# Altium PCB Flight Control Board.PcbDoc
Units mil, origin at the board's own origin, x right, y up, seen from the top; angles counter-clockwise.
Board outline 3604 x 4112 mil, 2 copper layers (Top Layer, Bottom Layer); 65 components, 67 nets, 299 pads, 15 vias.
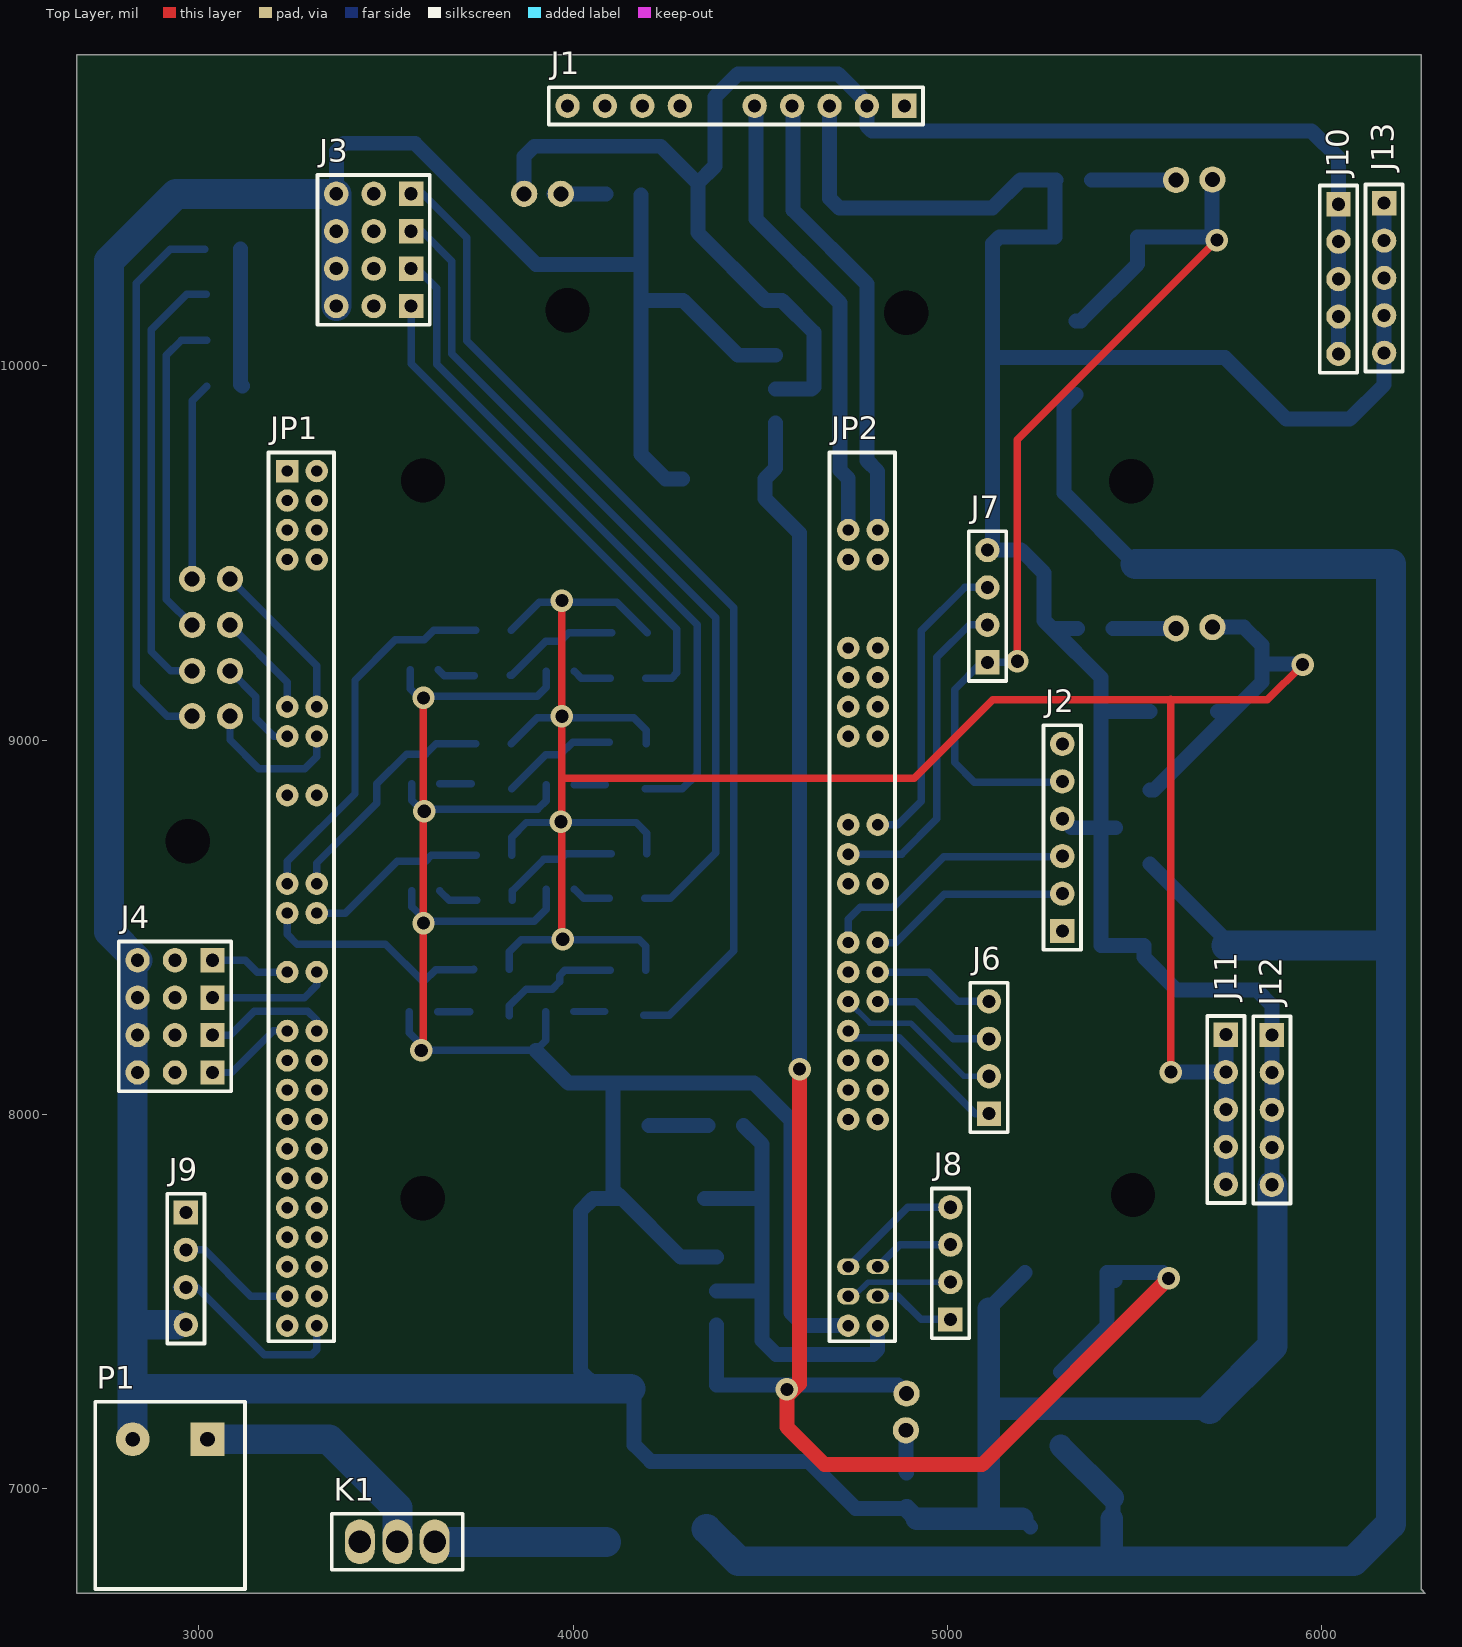
[diagram p0: Top Layer view]
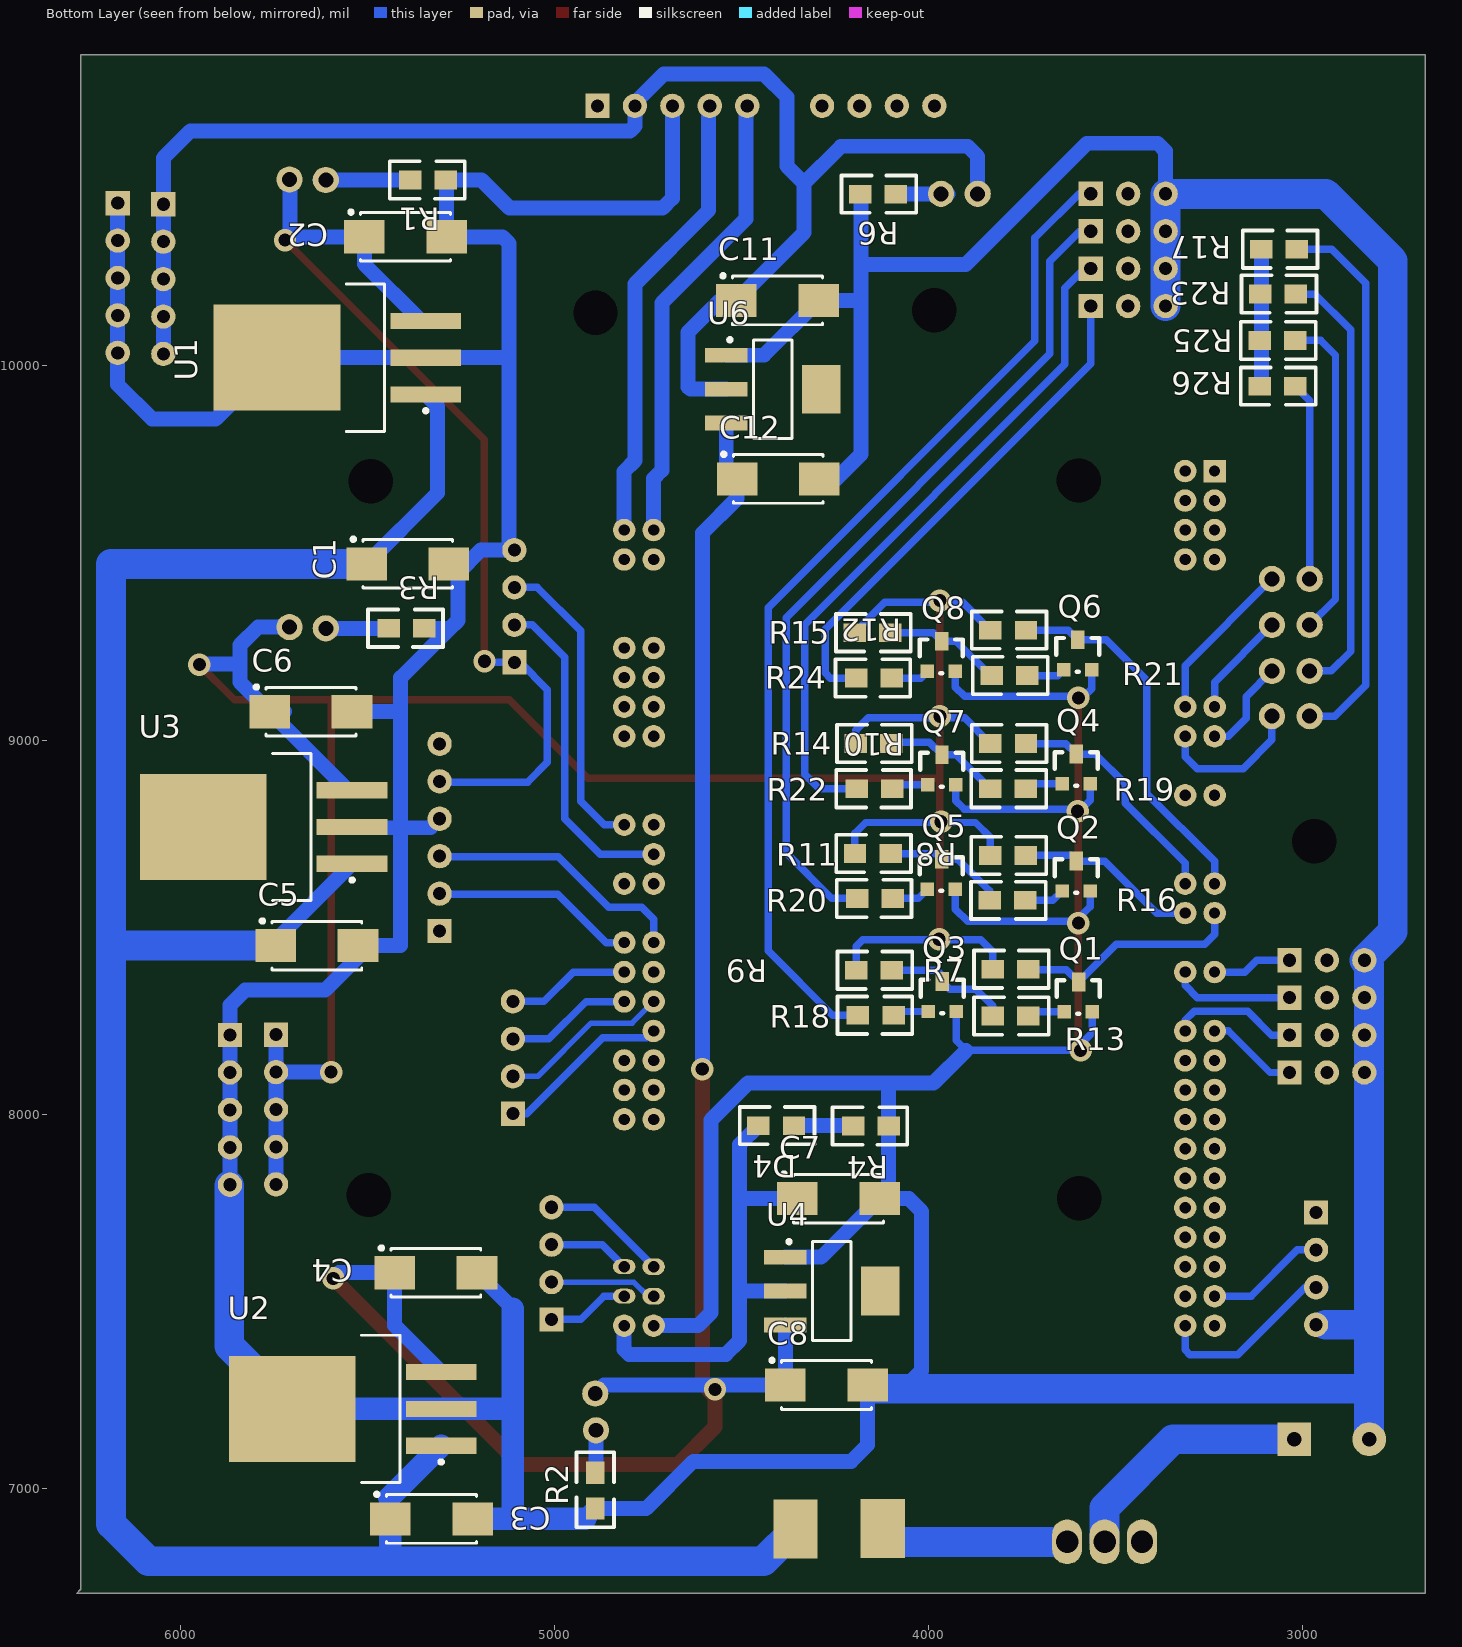
[diagram p1: Bottom Layer view, seen from below]

## Layer stack, top to bottom
Top Layer: signal copper 1.4
Dielectric: dielectric 12.6, FR-4, Dk 4.8
Bottom Layer: signal copper 1.4

## Board outline
2673,10827 2673,6720 6277,6720 6266,6731 6266,10832 2673,10832

## Design rules (kind name [scope] priority, off if disabled: settings)
Clearance [All] p1: gap=10
PolygonConnect [All] p1: connectstyle=Relief reliefconductorwidth=10 reliefentries=4 polygonreliefangle="90 Angle"
RoutingVias [All] p1: holewidth=28 width=50 viastyle="Through Hole" minholewidth=28 minwidth=50 maxholewidth=28 maxwidth=50
SilkscreenOverComponentPads [All] p1: minsilkscreentomaskgap=10
SolderMaskExpansion [All] p1: expansion=4
Width [All] p1: maxlimit=100 minlimit=15 preferedwidth=20
27 further rules are at their usual default settings.

## Components (designator, comment, footprint, x,y, rotation, side; value= is the part's Value field where it differs from the comment)
C1 "CAP_C" CAP_C 5392,9471 r180 bottom
C2 "CAP_C" CAP_C 5398,10345 r180 bottom
C3 "CAP_C" CAP_C 5329,6919 r180 bottom
C4 "CAP_C" CAP_C 5317,7577 r180 bottom
C5 "CAP_C" CAP_C 5635,8451 r180 bottom
C6 "CAP_C" CAP_C 5651,9076 r180 bottom
C7 "CAP_C" CAP_C 4241,7775 r180 bottom
C8 "CAP_C" CAP_C 4273,7277 r180 bottom
C11 "CAP_C" CAP_C 4404,10175 r180 bottom
C12 "CAP_C" CAP_C 4402,9698 r180 bottom
D4 "LED" LED 4455,7970 r180 bottom
J1 "传感器" Header10 4885,10695 r270 top
J2 "蓝牙" Header6 5307,8490 r180 top
J3 "捕获信号线" Header4*3 3567,10160 r180 top
J4 "PWM信号线" Header4*3 3036,8112 r180 top
J6 "TIM8" Header4 5111,8002 r180 top
J7 "UART4" Header4 5107,9208 r180 top
J8 "SPI2" Header4 5008,7452 r180 top
J9 "UART3" Header4 2965,7738 r0 top
J10 "3.3v电源" Header5 6045,10432 r0 top
J11 "5v电源" Header5 5744,8213 r0 top
J12 "GND" Header5 5867,8212 r0 top
J13 "Comment" Header5 6167,10435 r0 top
JP1 "Header60" Header60#1 3236,9719 r0 top
JP2 "Header60" Header60#2 4735,9719 r0 top
K1 "KEY" KEY 3630,6858 r270 top
P1 "POWER" POWER 2823,7132 r90 top
Q1 "NPN" NPN 3600,8314 r180 bottom
Q2 "NPN" NPN 3606,8637 r180 bottom
Q3 "NPN" NPN 3964,8315 r180 bottom
Q4 "NPN" NPN 3606,8923 r180 bottom
Q5 "NPN" NPN 3966,8642 r180 bottom
Q6 "NPN" NPN 3602,9228 r180 bottom
Q7 "NPN" NPN 3965,8921 r180 bottom
Q8 "NPN" NPN 3966,9224 r180 bottom
R1 "RES" LED 5290,10497 r0 bottom
R2 "RES" LED 4891,6947 r90 bottom
R3 "RES" LED 5348,9299 r0 bottom
R4 "RES" LED 4107,7969 r0 bottom
R6 "RES" LED 4183,10459 r180 bottom
R7 "RES" LED 3829,8388 r180 bottom
R8 "RES" LED 3836,8692 r180 bottom
R9 "RES" LED 4194,8385 r180 bottom
R10 "RES" LED 3835,8991 r180 bottom
R11 "RES" LED 4197,8697 r180 bottom
R12 "RES" LED 3835,9294 r180 bottom
R13 "RES" LED 3829,8263 r180 bottom
R14 "RES" LED 4195,8991 r180 bottom
R15 "RES" LED 4198,9287 r180 bottom
R16 "RES" LED 3837,8572 r180 bottom
R17 "RES" LED 3111,10312 r180 bottom
R18 "RES" LED 4094,8265 r0 bottom
R19 "RES" LED 3836,8870 r180 bottom
R20 "RES" LED 4096,8577 r0 bottom
R21 "RES" LED 3832,9173 r180 bottom
R22 "RES" LED 4097,8870 r0 bottom
R23 "RES" LED 3114,10192 r180 bottom
R24 "RES" LED 4099,9166 r0 bottom
R25 "RES" LED 3116,10068 r180 bottom
R26 "RES" LED 3116,9946 r180 bottom
U1 "LM2940" 2940 5580,10022 r0 bottom
U2 "LM2940" 2940 5539,7213 r0 bottom
U3 "LM2940" 2940 5777,8768 r0 bottom
U4 "LM1117" 1117 4259,7528 r180 bottom
U6 "LM1117" 1117 4417,9938 r180 bottom

## Footprints (in the part's own frame and the unit in brackets; to place one, negate y for a bottom-side part, rotate by r counter-clockwise, add the part's x,y. Pads: shape width x height; smd on the part's side, far side on the other; paste and mask are expansions set on the pad)
1117 [mm]
  rect 2.9x1 smd: 1(-3.15,2.3) 2(-3.15,0) 3(-3.15,-2.3)
  rect 2.6x3.3 smd: 4(3.3,0)
  silkscreen extent -3.03,-3.35 1.3,3.47, body extent -1.85,-3.35 1.85,3.35, height 1.8
2940 [mm]
  rect 4.8x1.1 smd: 1(-6,2.5) 2(-6,0) 3(-6,-2.5)
  rect 8.6x7.2 smd: 4(4.1,0)
  silkscreen extent -6.12,-5 -0.6,5, body extent -4.9,-5 5.6,5, height 4.38
CAP_C [mm]
  rect 2.75x2.25 smd: 1(-2.794,0) 2(2.794,0)
  silkscreen extent -3.83,-1.65 3.05,1.8, body extent -3.05,-1.65 3.05,1.65, height 2.6
Header4 [mil]
  rect 65x65 hole 35: 1(0,0)
  round 65 hole 35: 2(0,-100) 3(0,-200) 4(0,-300)
  silkscreen extent -50,-350 50,50
Header4*3 [mil]
  rect 65x65 hole 35: 1(0,0) 4(0,-100) 7(0,-200) 10(0,-300)
  round 65 hole 35: 2(100,0) 3(200,0) 5(100,-100) 6(200,-100) 8(100,-200) 9(200,-200) 11(100,-300) 12(200,-300)
  silkscreen extent -50,-350 250,50
Header5 [mil]
  rect 65x65 hole 35: 1(0,0)
  round 65 hole 35: 2(0,-100) 3(0,-200) 4(0,-300) 5(0,-400)
  silkscreen extent -50,-450 50,50
Header6 [mil]
  rect 65x65 hole 35: 1(0,0)
  round 65 hole 35: 2(0,-100) 3(0,-200) 4(0,-300) 6(0,-500)
  round 65 hole 35 paste+0: 5(0,-400)
  silkscreen extent -50,-550 50,50
Header10 [mil]
  rect 65x65 hole 35: 1(0,0)
  round 65 hole 35: 2(0,-100) 3(0,-200) 4(0,-300) 5(0,-400) 7(0,-600) 8(0,-700) 9(0,-800) 10(0,-900)
  silkscreen extent -50,-950 50,50
Header60#1 [mil]
  rect 60x60 hole 30: 1(0,0)
  round 60 hole 30: 2(78.74,0) 3(0,-78.74) 4(78.74,-78.74) 5(0,-157.48) 6(78.74,-157.48) 7(0,-236.22) 8(78.74,-236.22) 17(0,-629.92) 18(78.74,-629.92) 19(0,-708.66) 20(78.74,-708.66) 23(0,-866.14) 24(78.74,-866.14) 29(0,-1102.36) 30(78.74,-1102.36) 31(0,-1181.1) 32(78.74,-1181.1) 35(0,-1338.58) 36(78.74,-1338.58) 39(0,-1496.06) 40(78.74,-1496.06) 41(0,-1574.8) 42(78.74,-1574.8) 43(0,-1653.54) 44(78.74,-1653.54) 45(0,-1732.28) 46(78.74,-1732.28) 47(0,-1811.02) 48(78.74,-1811.02) 49(0,-1889.76) 50(78.74,-1889.76) 51(0,-1968.5) 52(78.74,-1968.5) 53(0,-2047.24) 54(78.74,-2047.24) 55(0,-2125.98) 56(78.74,-2125.98) 57(0,-2204.72) 58(78.74,-2204.72) 59(0,-2283.46) 60(78.74,-2283.46)
  silkscreen extent -50,-2325 125,50
Header60#2 [mil]
  round 60 hole 30: 5(0,-157.48) 6(78.74,-157.48) 7(0,-236.22) 8(78.74,-236.22) 13(0,-472.44) 14(78.74,-472.44) 15(0,-551.18) 16(78.74,-551.18) 17(0,-629.92) 18(78.74,-629.92) 19(0,-708.66) 20(78.74,-708.66) 25(0,-944.88) 26(78.74,-944.88) 27(0,-1023.62) 29(0,-1102.36) 30(78.74,-1102.36) 33(0,-1259.84) 34(78.74,-1259.84) 35(0,-1338.58) 36(78.74,-1338.58) 37(0,-1417.32) 38(78.74,-1417.32) 39(0,-1496.06) 41(0,-1574.8) 42(78.74,-1574.8) 43(0,-1653.54) 44(78.74,-1653.54) 45(0,-1732.28) 46(78.74,-1732.28) 59(0,-2283.46) 60(78.74,-2283.46)
  oval 60x45 hole 30: 55(0,-2125.98) 57(0,-2204.72)
  oval 60x40 hole 30: 56(78.74,-2125.98) 58(78.74,-2204.72)
  silkscreen extent -50,-2325 125,50
KEY [mil]
  oval 120x80 hole 60: 1(0,0) 2(0,-100) 3(0,-200)
  silkscreen extent -75,-275 75,75
LED [mil]
  rect 60x50 smd: 1(0,0) 2(95,0)
  silkscreen extent -50,-50 150,50
NPN [mil]
  rect 36x36 smd: b(-37.5,-40) e(37.5,-40)
  rect 36x50 smd: c(0.5,40)
  silkscreen extent -58,-45 58,45
POWER [mil]
  round 90 hole 39.37: 1(0,0)
  rect 90x90 hole 39.37 mask+4: 2(0,-200)
  silkscreen extent -400,-300 100,100

## Part data
J1: library part Header10
J2: library part Header6
J3 J4: library part Header4*3
J6 J7 J8 J9: library part Header4
J10 J11 J12: library part Header5

## Free pads (board coordinates)
  round 60 hole 118.11: 0(2970,8730) 0(3599,9694) 0(4890,10142) 1(3985,10149) 1(5491,9692) 2(3598,7776) 3(5496,7785)
  round 70 hole 40: 2(5611,10497) 3(5708,10498) 4(5611,9299) 5(5708,9302) 6(3967,10460) 6(4889,7156) 9(3869,10460) 9(4891,7254) 10(3083,9431) 11(3083,9308) 12(3083,9185) 13(3083,9064) 14(2982,9064) 15(2982,9185) 16(2982,9308) 17(2982,9431)
  rect 118.11x157.48 smd far side: 7(4123,6893) 8(4356,6892)

## Via types
v1: diameter 60, hole 35, Top Layer to Bottom Layer, 15 vias

## Nets (pads, with @x,y where several pads share a name; then routed paths per layer and width w, separated by ;. In a path a pad name is that pad's centre, name@x,y a point inside that pad or via, vN(x,y) a via of type N, cw(c..) or ccw(c..) an arc to the next point about the centre after c; other vN are vias at no path point)
A0: J3.1 R24.2 | length 1362.9
  Bottom Layer w20: J3.1 3567,10006 4277,9296 4277,9180 4263,9166 R24.2
A1: J3.4 R22.2 | length 1832.6
  Bottom Layer w20: J3.4 3584,10260 3636,10208 3636,10004 4331,9309 4331,8909 4292,8870 R22.2
A2: J3.7 R20.2 | length 2255.7
  Bottom Layer w20: J3.7 3596,10360 3676,10280 3676,10032 4381,9327 4381,8699 4259,8577 R20.2
A3: J3.10 R18.2 | length 2709.5
  Bottom Layer w20: J3.10 3598,10460 3716,10342 3716,10067 4429,9354 4429,8437 4257,8265 R18.2
GND: C1.2 C2.2 C3.2 C4.2 C5.2 C6.2 C7.2 C8.2 C11.2 C12.2 J1.3 J2.4 J3.3 J3.6 J3.9 J3.12 J4.3 J4.6 J4.9 J4.12 J7.4 J9.4 J12.1 J12.2 J12.3 J12.4 J12.5 J13.1 J13.2 J13.3 J13.4 J13.5 JP2.59 P1.1 Q1.e Q2.e Q3.e Q4.e Q5.e Q6.e Q7.e Q8.e R1.1 R2.1 R3.1 R4.1 R6.1 U1.2 U1.4 U2.2 U2.4 U3.2 U4.1 U6.1 | length 23102.3
  Top Layer w20: v1@3600,8177 v1(3600,8511) v1(3600,9113)
  Bottom Layer w20: Q1.e 3562.5,8218.5 3610,8171 3900,8171 3926.5,8197.5 Q3.e ; Q6.e 3564.5,9137.5 3585,9117 3904,9117 3928.5,9141.5 Q8.e ; Q2.e 3568.5,8555.5 3608,8516 3896,8516 3928.5,8548.5 Q5.e ; Q4.e 3568.5,8839.5 3592,8816 3905,8816 3927.5,8838.5 Q7.e
  Bottom Layer w40: J3.12 3367,10574 3388,10595 3577,10595 3901,10271 4181,10271 ; 3900,8171 3987,8084 4483,8084 4582,7985 4582,7470 4616.46,7435.54 JP2.59 ; 4107,8081 R4.1 4107,7799 C7.2 ; R6.1@4181,10457 4181,10175 ; C12.2 4247,9698 4181,9764 4181,10175 ; U4.1 4287.45,7618.55 C7.2 ; U6.1 4440.45,10028.55 C11.2 4181,10175 ; J1.3 4685,10448 4711,10422 5120,10422 5195,10497 R1.1 ; R2.1 4755,6947 4629,7073 4207,7073 4163,7117 C8.2 4057,7277 4019,7315 4019,7741 4053,7775 C7.2 ; 5111,7481 C4.2 ; 5123,10022 U1.2 U1.4 5905.42,9858 6075,9858 6167,9950 J13.5 J13.4 J13.3 J13.2 J13.1 ; C3.2@5200,6920 C3.2@5222,6898 ; R1.1@5288,10495 C2.2 5139,10345 5121,10327 5121,9522 J7.4 5197,9508 5258,9447 5258,9320 5281,9297 ; 5331,8766 5411,8766 ; R3.1 5281,9299 5281,9297 ; 5419,9076 C6.2 ; U3.2@5448.78,8766 5411,8766 ; J12.5 J12.4 J12.3 J12.2 J12.1 5867,8292 5827,8332 5613,8332 5525,8420 C5.2 5411,8451 5411,8766 ; 5281,9297 5411,9167 5411,8766
  Bottom Layer w50: R2.1 4918,6920
  Bottom Layer w60: 4918,6920 C3.2@5200,6920 ; 5111,6925 5111,7213 ; 5111,7481 5111,7213 ; U2.4 U2.2 5111,7213
  Bottom Layer w80: P1.1 2823,7267 ; 2832,7438 J9.4@2940,7438 ; J3.3 J3.6 J3.9 J3.12 2939,10460 2760,10281 2760,8488 J4.12 2823,8399 2823,7267 ; C8.2@4153,7267 2823,7267 ; U2.4 5869,7381.58 J12.5@5869,7810
  other v1: 3594,8171 3602,8810
NetD1_2: pad.2@5611,10497 R1.2 | length 241
  Bottom Layer w40: R1.2 5611,10497 pad.2@5626,10497
NetD2_2: pad.6@4889,7156 R2.2 | length 114.8
  Bottom Layer w40: pad.6@4889,7156 4889,7044 R2.2
NetD3_2: pad.4 R3.2 | length 168
  Bottom Layer w40: R3.2 pad.4
NetD4_2: D4.2 R4.2 | length 157
  Bottom Layer w40: R4.2@4203,7970 D4.2
NetD5_2: 
NetD6_2: pad.6@3967,10460 R6.2 | length 139
  Bottom Layer w40: pad.6@3949,10459 R6.2
NetD7_1: pad.14 R17.2 | length 1480.1
  Bottom Layer w20: pad.14 2915,9064 2832,9147 2832,10221 2923,10312 R17.2
NetD8_1: pad.15 R23.2 | length 1177.5
  Bottom Layer w20: pad.15 2924,9185 2872,9237 2872,10096.28 2967.72,10192 R23.2
NetD9_1: pad.16 R25.2 | length 873.1
  Bottom Layer w20: pad.16 2913,9377 2913,10028 2953,10068 R25.2
NetD10_1: pad.17 R26.2 | length 531.2
  Bottom Layer w20: pad.17 2982,9907 R26.2
NetF1_2: K1.1 pad.7 | length 458
  Bottom Layer w80: K1.1 pad.7@4088,6858
NetK1_2: K1.2 P1.2 | length 673.8
  Bottom Layer w80: P1.2 3347,7132 3530,6949 K1.2
NetQ1_B: Q1.b R13.2 | length 85.5
  Bottom Layer w20: Q1.b R13.2@3723,8274
NetQ2_B: Q2.b R16.2 | length 108.9
  Bottom Layer w20: Q2.b 3668.5,8572 R16.2
NetQ3_B: Q3.b R18.1 | length 82.5
  Bottom Layer w20: Q3.b R18.1@4084,8275
NetQ3_C: Q3.c R9.2 R13.1 | length 345.4
  Bottom Layer w20: R13.1 3829,8290 3874,8335 3943.5,8335 Q3.c 3963.5,8370.5 3978,8385 R9.2
NetQ4_B: Q4.b R19.2 | length 84.5
  Bottom Layer w20: Q4.b R19.2@3728,8883
NetQ5_B: Q5.b R20.1 | length 102.9
  Bottom Layer w20: Q5.b 4028.5,8577 R20.1
NetQ5_C: Q5.c R11.2 R16.1 | length 331.4
  Bottom Layer w20: R16.1 3837,8597 3922,8682 Q5.c 3980.5,8697 R11.2
NetQ6_B: Q6.b R21.2 | length 103.1
  Bottom Layer w20: Q6.b 3655.5,9172 R21.2@3736,9172
NetQ7_B: Q7.b R22.1 | length 83.5
  Bottom Layer w20: Q7.b R22.1@4086,8881
NetQ7_C: Q7.c R14.2 R19.1 | length 311.8
  Bottom Layer w20: R19.1 3927,8961 Q7.c 3998.5,8995 R14.2@4096,8995
NetQ8_B: Q8.b R24.1 | length 103
  Bottom Layer w20: Q8.b 4021.5,9166 R24.1
NetQ8_C: Q8.c R15.2 R21.1 | length 318.2
  Bottom Layer w20: R21.1 3836,9173 3927,9264 Q8.c 3988.5,9287 R15.2
PA0: JP1.30 Q4.c R10.2 | length 642.5
  Bottom Layer w20: JP1.30 3314.74,8671.74 3475,8832 3475,8883 3555,8963 Q4.c 3633.5,8991 R10.2
PA1: JP1.29 Q6.c R12.2 | length 996.8
  Bottom Layer w20: JP1.29 3236,8676 3417,8857 3417,9160 3525,9268 Q6.c 3627.5,9294 R12.2
PA2: JP1.32 Q2.c R8.2 | length 490.1
  Bottom Layer w20: JP1.32 3390.9,8537.9 3530,8677 Q2.c 3620.5,8692 R8.2
PA3: JP1.31 Q1.c R7.2 | length 621.6
  Bottom Layer w20: JP1.31 3236,8481 3262,8455 3498.5,8455 Q1.c 3632.5,8387 3733,8387 R7.2
PA4: 
PA5: 
PA6: J4.7 JP1.36 | length 328
  Bottom Layer w20: J4.7 3282,8312 3314.74,8344.74 JP1.36
PA7: J4.10 JP1.35 | length 213.1
  Bottom Layer w20: J4.10 3124,8412 3155.58,8380.42 JP1.35
PA9: J2.2 JP2.34 | length 544.6
  Bottom Layer w20: JP2.34 4862.16,8459.16 4991,8588 J2.2@5305,8588
PA10: J2.3 JP2.33 | length 701
  Bottom Layer w20: JP2.33 4735,8521 4767,8553 4855,8553 4990,8688 J2.3@5305,8688
PB0: J4.4 JP1.40 | length 344.4
  Bottom Layer w20: J4.4 3084,8212 3148,8276 3291,8276 3314.74,8252.26 JP1.40
PB1: J4.1 JP1.39 | length 246
  Bottom Layer w20: J4.1 3088,8112 3198.94,8222.94 JP1.39
PB6: J1.4 JP2.6 | length 1224
  Bottom Layer w40: J1.4@4588,10692 4588,10416 4785,10219 4785,9747 4813.74,9718.26 JP2.6
PB7: J1.5 JP2.5 | length 1232.8
  Bottom Layer w40: J1.5@4488,10692 4488,10393 4713,10168 4713,9721 4735,9699 JP2.5
PB10: J9.2 JP1.57 | length 322.2
  Bottom Layer w20: J9.2 3015,7638 3138.72,7514.28 JP1.57
PB11: J9.3 JP1.60 | length 519.4
  Bottom Layer w20: J9.3@2940,7538 2994,7538 3174,7358 3302,7358 3314.74,7370.74 JP1.60
PB12: J8.1 JP2.58 | length 220.1
  Bottom Layer w20: JP2.58 4867.72,7514.28 4930,7452 J8.1
PB13: J8.2 JP2.57 | length 288.6
  Bottom Layer w15: JP2.57 4750.71,7514.28 4788.43,7552 J8.2
PB14: J8.3 JP2.56 | length 218.7
  Bottom Layer w20: JP2.56 4872.72,7652 J8.3
PB15: J8.4 JP2.55 | length 338.9
  Bottom Layer w20: JP2.55 4893.98,7752 J8.4
PC6: J6.1 JP2.39 | length 467.5
  Bottom Layer w20: JP2.39 4752.94,8205 4871,8205 5074,8002 J6.1
PC7: J6.3 JP2.38 | length 338.5
  Bottom Layer w20: JP2.38 4915.32,8301.68 5015,8202 J6.3
PC8: J6.2 JP2.37 | length 458.7
  Bottom Layer w15: JP2.37 4792.68,8244 4902,8244 5044,8102 J6.2
PC9: J6.4 JP2.36 | length 329.7
  Bottom Layer w20: JP2.36 4949.58,8380.42 5028,8302 J6.4
PC10: J7.2 JP2.27 | length 878.2
  Bottom Layer w20: JP2.27 4877.38,8695.38 4972,8790 4972,9221 5059,9308 J7.2
PC11: J7.3 JP2.26 | length 822.4
  Bottom Layer w20: JP2.26 4867.12,8774.12 4930,8837 4930,9292 5046,9408 J7.3
PF7: JP1.18 pad.10 | length 437.9
  Bottom Layer w20: pad.10 3314.74,9199.26 JP1.18
PF8: JP1.17 pad.11 | length 286.5
  Bottom Layer w20: pad.11 3236,9155 JP1.17 JP1.17@3233,9092.08
PF9: JP1.20 pad.13 | length 394.4
  Bottom Layer w20: pad.13 3083,9001 3160,8924 3283,8924 3314.74,8955.74 JP1.20
PF10: JP1.19 pad.12 | length 259.3
  Bottom Layer w20: pad.12 3152,9116 3152,9058 3199.66,9010.34 JP1.19
VCC: R17.1 R23.1 R25.1 R26.1 | length 368.1
  Bottom Layer w40: R17.1 3111,9951 R26.1
VCC_3.3V_1: 
VCC_3.3V_2: C7.1 D4.1 JP2.60 U4.2 | length 1261.8
  Bottom Layer w40: C7.1 4503,7775 ; U4.2 4505,7528 ; D4.1 4505,7920 4505,7528 ; JP2.60 4813.74,7371.74 4801,7359 4542,7359 4505,7396 4505,7528
VCC_3.3V_3: C11.1 J1.2 J10.1 J10.2 J10.3 J10.4 J10.5 pad.9@3869,10460 U6.2 | length 4013.3
  Bottom Layer w40: pad.9@3869,10460 3869,10560 3896,10587 4234,10587 4333,10488 ; U6.2 4637,9938 4643,9944 4643,10090 4558,10175 C11.1 4333,10356 4333,10488 ; J10.5 J10.4 J10.3 J10.2 J10.1 6045,10556 5973,10628 4798,10628 4785,10641 J1.2 4785,10703 4708,10780 4440,10780 4379,10719 4379,10534 4333,10488
VCC_5V_1: C2.1 J2.5 J7.1 pad.3@5708,10498 U1.3 | length 2697
  Top Layer w20: v1(5187,9211) 5187,9803 v1(5720,10336)
  Bottom Layer w20: v1@5180,9208 J7.1 5092,9208 5019,9135 5019,8941 5072,8888 5305,8888 J2.5
  Bottom Layer w40: U1.3 5356.43,10120.43 5508,10272 C2.1 v1@5707,10345 ; pad.3@5707,10497 v1@5707,10345 ; v1@5710,10342 v1@5707,10345
VCC_5V_2: C4.1 C8.1 C12.1 pad.9@4891,7254 U2.3 U4.3 U6.3 | length 5210.1
  Top Layer w40: v1(4605,8121) 4605,7280 4571,7246 4571,7165 4672,7064 5093,7064 v1(5591,7562)
  Bottom Layer w40: U4.3 C8.1 4868,7277 pad.9@4891,7254 ; U6.3 4541,9727 C12.1 4512,9646 4605,9553 v1(4605,8121) ; U2.3 5427,7435.65 C4.1 ; C4.1@5448,7556 C4.1 ; v1(5591,7562) 5576,7577 C4.1
  other v1: 4571,7265
VCC_5V_3: C6.1 J11.1 J11.2 J11.3 J11.4 J11.5 pad.5 R7.1 R8.1 R9.1 R10.1 R11.1 R12.1 R14.1 R15.1 U3.3 | length 7219.1
  Top Layer w20: v1(3970,9373) v1(3970,9064) 3970,8470 v1(3972,8468) ; 3975,8898 4911,8898 5121,9108 5596,9108 ; v1(5597,8113) 5597,9109 5598,9108 5855,9108 v1(5949,9202)
  Bottom Layer w20: R7.1 3829,8435 3861,8467 4176,8467 4194,8449 R9.1 ; R10.1 3904,9060 4162,9060 4195,9027 R14.1 ; R12.1 3909,9368 4117,9368 R15.1 ; R8.1 3836,8741 3875,8780 4168,8780 4197,8751 R11.1
  Bottom Layer w40: U3.3 5551.43,8866.43 C6.1 ; v1(5597,8113) J11.2 ; pad.5 5792,9302 5840,9254 5840,9203 ; C6.1@5722,9076 C6.1 ; J11.5 J11.4 J11.3 J11.2 ; J11.1 J11.2 ; v1@5948,9203 5840,9203 ; C6.1 5840,9155 5840,9203
  other v1: 3967,8782
VCC_12V: C1.1 C3.1 C5.1 pad.8 U1.1 U2.1 U3.1 | length 6831.9
  Bottom Layer w40: U1.1 5312,9891.8 5312,9661 C1.1 ; 5442,6872 5442,6975.35 ; U3.1 5745,8465.35 C5.1
  Bottom Layer w60: U2.1 5442,6975.35 ; 5439,6810 C3.1
  Bottom Layer w80: pad.8 4442,6806 6085,6806 6185,6906 6185,9471 C1.1 ; C5.1 6166,8451
pads on no net: J1.1 J1.7 J1.8 J1.9 J1.10 J2.1 J2.6 J3.2 J3.5 J3.8 J3.11 J4.2 J4.5 J4.8 J4.11 J9.1 JP1.1 JP1.2 JP1.3 JP1.4 JP1.5 JP1.6 JP1.7 JP1.8 JP1.23 JP1.24 JP1.41 JP1.42 JP1.43 JP1.44 JP1.45 JP1.46 JP1.47 JP1.48 JP1.49 JP1.50 JP1.51 JP1.52 JP1.53 JP1.54 JP1.55 JP1.56 JP1.58 JP1.59 JP2.7 JP2.8 JP2.13 JP2.14 JP2.15 JP2.16 JP2.17 JP2.18 JP2.19 JP2.20 JP2.25 JP2.29 JP2.30 JP2.35 JP2.41 JP2.42 JP2.43 JP2.44 JP2.45 JP2.46 K1.3 U3.4 U4.4 U6.4

## Other copper
Top Layer:
  text "danpianji gongd" at 1159,10603 h100

## Silkscreen, mask and mechanical layers (free items; w line width, h text height)
Mechanical 1:
  lines w10: 2671,6723 6266,6723 6266,10831 2671,10831 2671,6723